# EAGLE board 4313 Xbee V1.1 (EAGLE 6.4)
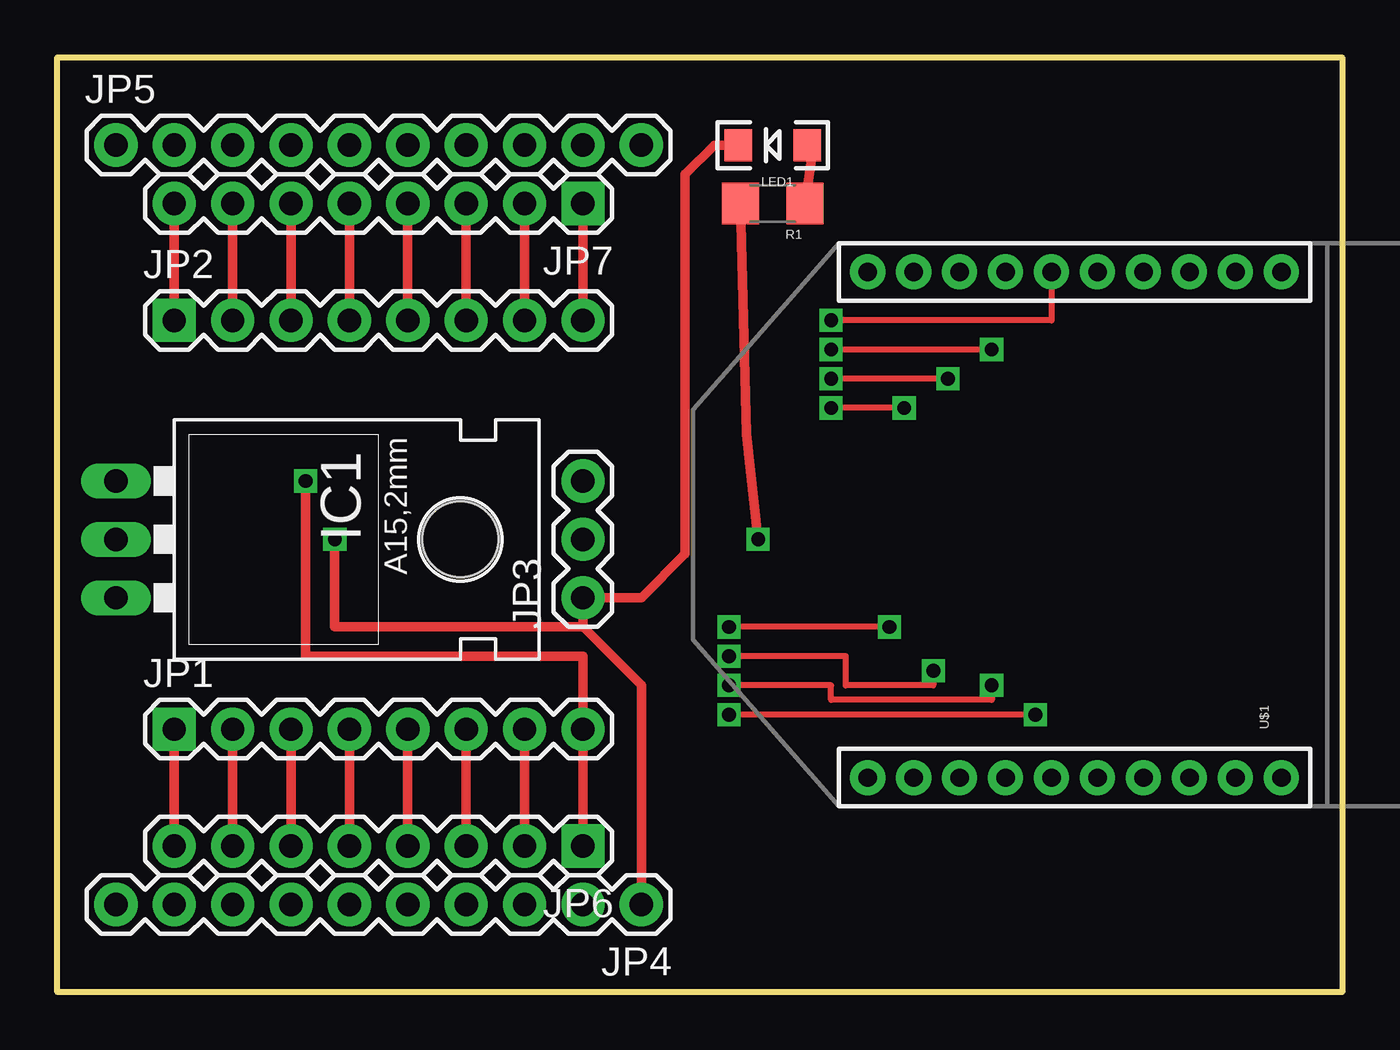
[diagram p0: board, top side]
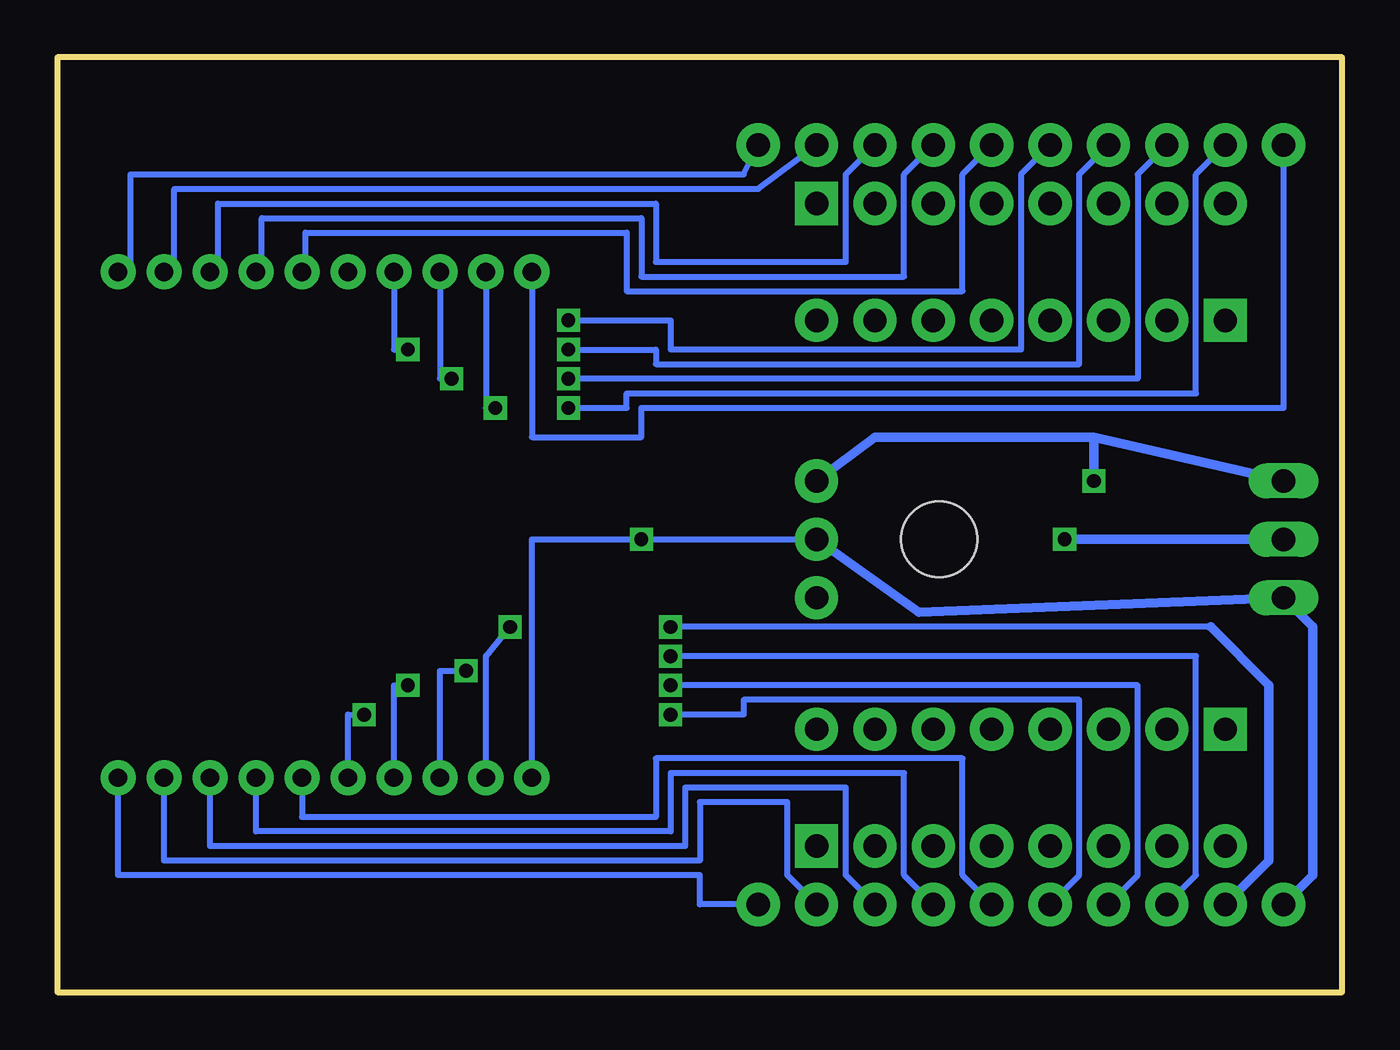
[diagram p1: board, bottom side, seen from below]

Size 55.88 x 40.64 mm. Coordinates in mm from the lower left corner, seen from the top.
Outline: 0,0 0,40.64 55.88,40.64 55.88,0 0,0
Copper layers (1*16): Top 0.035mm / dielectric 1.5mm / Bottom 0.035mm
Design rules "default": minimum track width 10mil, minimum drill 24mil, track to track 8mil, track to pad 8mil, pad to pad 8mil, via to via 8mil, smd to smd 8mil, copper to edge 40mil, drill to drill 8mil, minimum pad ring 10mil, minimum via ring 8mil, stop-mask expansion 4mil, vias tented up to drill 0mil, thermal gap 10mil

## Footprints (pad centres in the part's own frame; a part is rotated, then mirrored left to right if it is on the bottom)
78XXL = drill 1.016 long: GND 0,-3.81; IN -2.54,-3.81; OUT 2.54,-3.81 | hole 3.302: 0,11.176
1X08 = drill 1.016 pad 1.88 square: 1 0,0 | drill 1.016 pad 1.88: 2 2.54,0; 3 5.08,0; 4 7.62,0; 5 10.16,0; 6 12.7,0; 7 15.24,0; 8 17.78,0
1X03 = drill 1.016 pad 1.88: 1 0,0; 2 2.54,0; 3 5.08,0
1X10 = drill 1.016 pad 1.88: 1 0,0; 2 2.54,0; 3 5.08,0; 4 7.62,0; 5 10.16,0; 6 12.7,0; 7 15.24,0; 8 17.78,0; 9 20.32,0; 10 22.86,0
LED-1206 = smd 1.2 x 1.4: A -1.5,0; C 1.5,0
1206 = smd 1.6 x 1.8: 1 -1.4,0; 2 1.4,0
XBEE-1 = drill 0.8 pad 1.524: 1 -11,20; 2 -11,18; 3 -11,16; 4 -11,14; 5 -11,12; 6 -11,10; 7 -11,8; 8 -11,6; 9 -11,4; 10 -11,2; 11 11,2; 12 11,4; 13 11,6; 14 11,8; 15 11,10; 16 11,12; 17 11,14; 18 11,16; 19 11,18; 20 11,20

## Placement (x,y rotation side)
IC1  [78XXL]  6.35,19.69 270 top
JP1  [1X08]  5.08,11.43 0 top
JP2  [1X08]  5.08,29.21 0 top
JP3  [1X03]  22.86,17.14 90 top
JP4  M10"  [1X10]  25.4,3.81 180 top
JP5  M10"  [1X10]  2.54,36.83 0 top
JP6  [1X08]  22.86,6.35 180 top
JP7  [1X08]  22.86,34.29 180 top
LED1  [LED-1206]  31.12,36.83 180 top
R1  [1206]  31.12,34.29 180 top
U$1  XBEE-1B1  [XBEE-1]  55.24,20.32 90 top

## Library data of the parts
IC1 = SparkFun-PowerIC
JP1-JP7 = SparkFun-Connectors
LED1 = SparkFun-LED
R1 = SparkFun-Resistors
U$1 = SparkFun-RF

## Nets
3.3V: IC1.OUT JP3.2 JP4.10 R1.2 U$1.1
GND: IC1.GND JP3.1 JP4.1 LED1.C U$1.10
MISO: JP2.2 JP7.7
MOSI: JP2.3 JP7.6
N$1: LED1.A R1.1
N$3: JP4.2 U$1.9
N$4: JP4.3 U$1.8
N$5: JP4.4 U$1.7
N$6: JP4.5 U$1.6
N$7: JP4.6 U$1.5
N$8: JP4.7 U$1.4
N$9: JP4.8 U$1.3
N$10: JP4.9 U$1.2
N$12: JP5.1 U$1.20
N$13: JP5.2 U$1.19
N$14: JP5.3 U$1.18
N$15: JP5.4 U$1.17
N$16: JP5.5 U$1.16
N$17: JP5.6 U$1.15
N$18: JP5.7 U$1.14
N$19: JP5.8 U$1.13
N$20: JP5.9 U$1.12
N$22: JP5.10 U$1.11
PB0: JP2.8 JP7.1
PB1: JP2.7 JP7.2
PB2: JP2.6 JP7.3
PB3: JP2.5 JP7.4
PB4: JP2.4 JP7.5
PD0: JP1.1 JP6.8
PD1: JP1.2 JP6.7
PD2: JP1.3 JP6.6
PD3: JP1.4 JP6.5
PD4: JP1.5 JP6.4
PD5: JP1.6 JP6.3
PD6: JP1.7 JP6.2
SCK: JP2.1 JP7.8
VIN: IC1.IN JP1.8 JP3.3 JP6.1

## Tracks (layer width: path | path; a pad name or v marks a point on that pad's centre or on a via)
3.3V  (via drill 0.6)
  Top 0.406: R1.2 29.98,24.26 v30.48,19.69
  Bottom 0.254: U$1.1 35.24,19.69 v30.48,19.69 JP3.2
  Bottom 0.406: JP4.10 1.27,5.08 1.27,15.88 IC1.OUT 18.41,16.51 JP3.2
GND  (via drill 0.6)
  Top 0.406: 22.86,15.88 JP3.1 25.4,17.14 27.3,19.05 27.3,35.56 28.58,36.83 LED1.C | 22.86,15.88 25.4,13.34 JP4.1 | v12.06,19.69 12.06,15.88 22.86,15.88
  Bottom 0.254: JP4.1 27.94,3.81 27.94,5.08 53.24,5.08 U$1.10
  Bottom 0.406: IC1.GND v12.06,19.69
MISO
  Top 0.406: JP2.2 JP7.7
MOSI
  Top 0.406: JP7.6 JP2.3
N$1
  Top 0.406: R1.1 32.79,36.2 LED1.A
N$3
  Bottom 0.254: JP4.2 24.13,5.08 24.13,8.25 27.94,8.25 27.94,5.72 51.24,5.72 U$1.9
N$4
  Bottom 0.254: JP4.3 21.59,5.08 21.59,8.89 28.58,8.89 28.58,6.35 49.24,6.35 U$1.8
N$5
  Bottom 0.254: JP4.4 19.05,5.08 19.05,9.52 29.21,9.52 29.21,6.99 47.24,6.99 U$1.7
N$6
  Bottom 0.254: JP4.5 16.51,5.08 16.51,10.16 29.84,10.16 29.84,7.62 45.24,7.62 U$1.6
N$7  (via drill 0.6)
  Top 0.254: v42.55,12.07 v29.21,12.07
  Bottom 0.254: JP4.6 11.43,5.08 11.43,12.7 26.03,12.7 26.03,12.07 v29.21,12.07 | U$1.5 43.24,12.07 v42.55,12.07
N$8  (via drill 0.6)
  Top 0.254: v40.64,13.34 40.64,12.7 33.66,12.7 33.66,13.34 v29.21,13.34
  Bottom 0.254: JP4.7 8.89,5.08 8.89,13.34 v29.21,13.34 | U$1.4 41.24,13.34 v40.64,13.34
N$9  (via drill 0.6)
  Top 0.254: v38.1,13.97 38.1,13.34 34.29,13.34 34.29,14.61 v29.21,14.61
  Bottom 0.254: JP4.8 6.35,5.08 6.35,14.61 v29.21,14.61 | U$1.3 39.24,13.97 v38.1,13.97
N$10  (via drill 0.6)
  Top 0.254: v36.2,15.88 v29.21,15.88
  Bottom 0.254: 5.71,15.88 v29.21,15.88 | U$1.2 37.24,14.61 v36.2,15.88
  Bottom 0.406: JP4.9 3.18,5.72 3.18,13.34 5.71,15.88
N$12
  Bottom 0.254: U$1.20 35.24,24.13 30.48,24.13 30.48,25.4 2.54,25.4 JP5.1
N$13  (via drill 0.6)
  Top 0.254: v36.83,25.4 v33.66,25.4
  Bottom 0.254: U$1.19 37.24,25.4 v36.83,25.4 | v33.66,25.4 31.12,25.4 31.12,26.04 6.35,26.04 6.35,35.56 JP5.2
N$14  (via drill 0.6)
  Top 0.254: v38.73,26.67 v33.66,26.67
  Bottom 0.254: U$1.18 39.24,26.67 v38.73,26.67 | JP5.3 8.89,35.56 8.89,26.67 v33.66,26.67
N$15  (via drill 0.6)
  Top 0.254: v40.64,27.94 v33.66,27.94
  Bottom 0.254: U$1.17 41.24,27.94 v40.64,27.94 | v33.66,27.94 29.84,27.94 29.84,27.3 11.43,27.3 11.43,35.56 JP5.4
N$16  (via drill 0.6)
  Top 0.254: U$1.16 43.24,29.21 v33.66,29.21
  Bottom 0.254: v33.66,29.21 29.21,29.21 29.21,27.94 13.97,27.94 13.97,35.56 JP5.5
N$17
  Bottom 0.254: U$1.15 45.09,31.32 45.09,33.02 31.12,33.02 31.12,30.48 16.51,30.48 16.51,35.56 JP5.6
N$18
  Bottom 0.254: U$1.14 46.99,31.32 46.99,33.66 30.48,33.66 30.48,31.12 19.05,31.12 19.05,35.56 JP5.7
N$19
  Bottom 0.254: U$1.13 48.9,31.32 48.9,34.29 29.84,34.29 29.84,31.75 21.59,31.75 21.59,35.56 JP5.8
N$20
  Bottom 0.254: U$1.12 50.8,31.32 50.8,34.93 25.4,34.93 JP5.9
N$22
  Bottom 0.254: U$1.11 53.34,31.32 53.34,31.12 52.71,31.12 52.71,35.56 26.03,35.56 JP5.10
PB0
  Top 0.406: JP2.8 JP7.1
PB1
  Top 0.406: JP2.7 JP7.2
PB2
  Top 0.406: JP2.6 JP7.3
PB3
  Top 0.406: JP2.5 JP7.4
PB4
  Top 0.406: JP2.4 JP7.5
PD0
  Top 0.406: JP1.1 JP6.8
PD1
  Top 0.406: JP6.7 JP1.2
PD2
  Top 0.406: JP6.6 JP1.3
PD3
  Top 0.406: JP6.5 JP1.4
PD4
  Top 0.406: JP6.4 JP1.5
PD5
  Top 0.406: JP1.6 JP6.3
PD6
  Top 0.406: JP6.2 JP1.7
SCK
  Top 0.406: JP7.8 JP2.1
VIN  (via drill 0.6)
  Top 0.406: JP6.1 JP1.8 22.86,14.61 10.79,14.61 v10.79,22.23
  Bottom 0.406: v10.79,22.23 10.79,24.13 | 10.79,24.13 20.32,24.13 JP3.3 | IC1.IN 10.79,24.13